# Altium PCB SolarMetering1.0.PcbDoc
Units mil, origin at the board's own origin, x right, y up, seen from the top; angles counter-clockwise.
Board outline 6000 x 4000 mil, 2 copper layers (Top Layer, Bottom Layer); 112 components, 77 nets, 362 pads, 0 vias.
Unrouted connection lines stored in the file: 249.
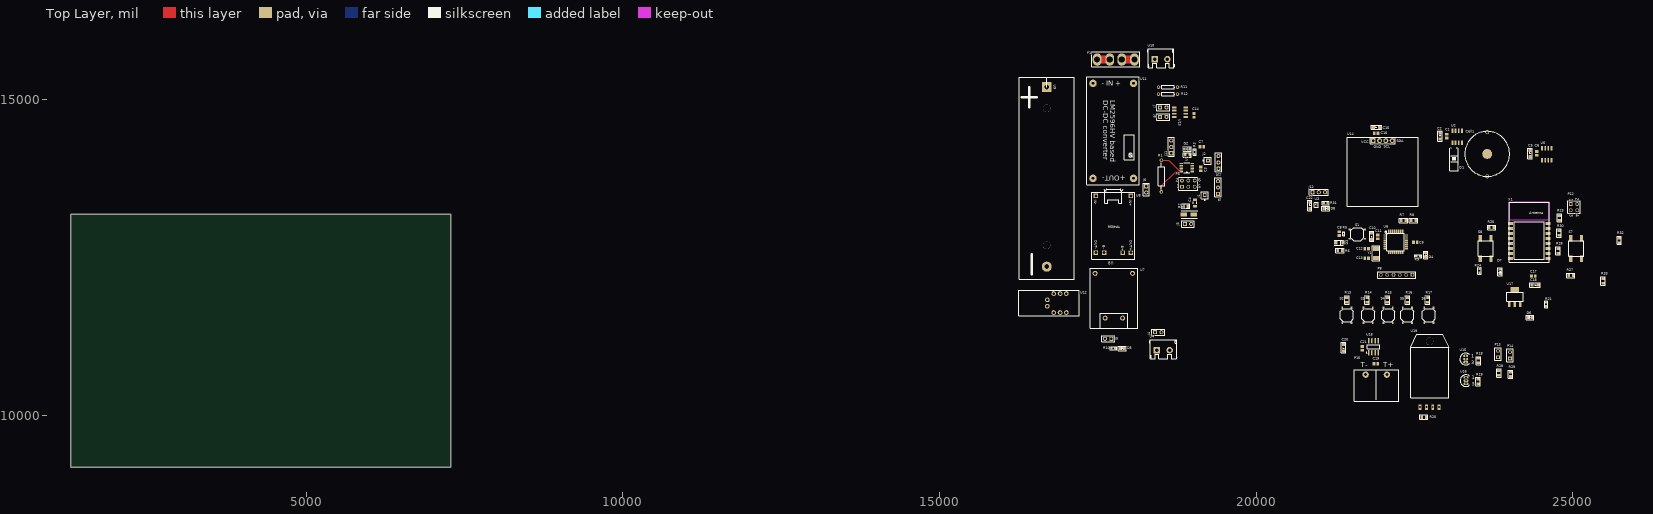
[diagram p0: Top Layer view]
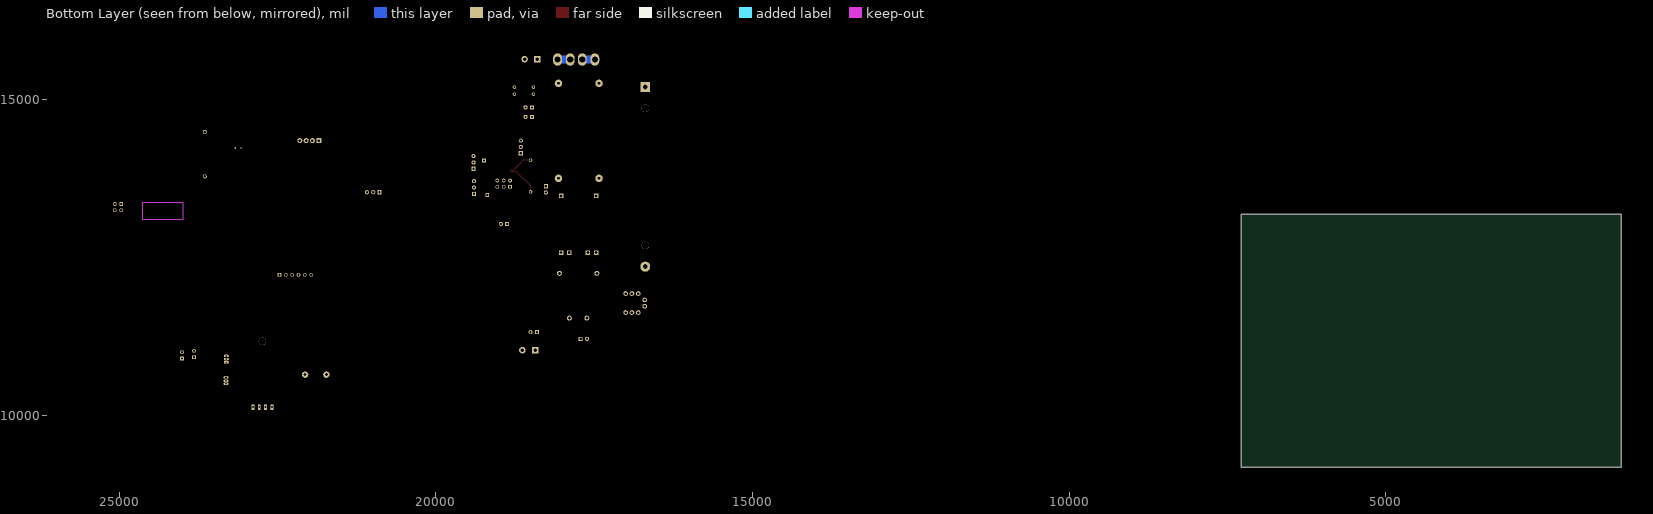
[diagram p1: Bottom Layer view, seen from below]

## Layer stack, top to bottom
Top Solder: solder mask 0.4, Solder Resist, Dk 3.5
Top Layer: signal copper 1.4
Dielectric 1: dielectric 12.6, FR-4, Dk 4.8
Bottom Layer: signal copper 1.4
Bottom Solder: solder mask 0.4, Solder Resist, Dk 3.5

## Board outline
1280,9185 7280,9185 7280,13185 1280,13185

## Design rules (kind name [scope] priority, off if disabled: settings)
Clearance [All] p1: gap=10
PolygonConnect [All] p1: connectstyle=Relief reliefconductorwidth=10 reliefentries=4 polygonreliefangle="90 Angle" airgapwidth=10
RoutingLayers "Schematic Routing Layers_1" [InNet('XTAL2')] p1: top layer_v5=TRUE bottom layer_v5=FALSE
RoutingLayers "Schematic Routing Layers" [InNet('XTAL1')] p2: top layer_v5=TRUE bottom layer_v5=FALSE
RoutingLayers [All] p3: top layer_v5=TRUE bottom layer_v5=TRUE
RoutingVias [All] p1: holewidth=28 width=50 viastyle="Through Hole" minholewidth=28 minwidth=50 maxholewidth=28 maxwidth=50
SolderMaskExpansion [All] p1: expansion=4
Width "Schematic Width Constraint_3" [InNet('NetJ8_2')] p1: maxlimit=70 minlimit=70 preferedwidth=70 minimp=50.000000 maximp=50.000000 favimp=50.000000
Width "Schematic Width Constraint_2" [InNet('NetP7_1')] p2: maxlimit=70 minlimit=70 preferedwidth=70 minimp=50.000000 maximp=50.000000 favimp=50.000000
Width "Schematic Width Constraint_1" [InNet('NetP9_2')] p3: maxlimit=70 minlimit=70 preferedwidth=70 minimp=50.000000 maximp=50.000000 favimp=50.000000
Width "Schematic Width Constraint" [InNet('NetJ7_2')] p4: maxlimit=70 minlimit=70 preferedwidth=70 minimp=50.000000 maximp=50.000000 favimp=50.000000
Width [All] p5: maxlimit=100 minlimit=10 preferedwidth=10
29 further rules are at their usual default settings.

## Components (designator, comment, footprint, x,y, rotation, side; value= is the part's Value field where it differs from the comment)
C1 "302010165" C0805 23010,14414.53 r90 top
C2 "302020002" AVX-A 22905,14420 r270 top
C3 "302010165" C0805 19130,13900 r270 top
C4 "302010189" C1206 19035,13360 r270 top
C5 "302020002" AVX-A 24325,14140 r270 top
C6 "302010165" C0805 24430,14145 r90 top
C7 "302010165" C0805 19145,14245 r180 top
C8 "302010165" C0805 21310,12875 r270 top
C9 "302010165" C0805 22515,12740 r0 top
C10 "302020002" AVX-A 21825,12835 r90 top
C11 "302010165" C0805 21920,12825 r270 top
C12 "302010018" C0805 21745,12640 r0 top
C13 "302010018" C0805 21745,12490 r0 top
C14 "1nF Filter" C0805 19020,14745 r90 top
C15 "302020002" AVX-A 21900,14555 r0 top
C16 "302010165" C0805 21895,14465 r180 top
C17 "302010165" C0805 24379.53,12200 r0 top
C18 "302020002" AVX-A 24405,12065 r180 top
C19 "302010175" C0805 21890.47,10825 r0 top
C20 "302020002" AVX-A 21380,11075 r90 top
C21 "302010165" C0805 21675,11065.47 r270 top
C22 "302020002" AVX-A 20850,13320 r270 top
Cell1 "Cell-CR1616" CellCR1616 23650,13780.67 r90 top
D1 "SMAJ75A-13-F" SMAJ5.0-TVS 19017.48,13180 r180 top
D2 "304090046" LED-0805 18915,14215 r180 top
D3 "Diode" "1206 Diode SMD" 21375,12735 r180 top
D4 "304090046" LED-0805 22680,12538.9 r90 top
D5 "304090046" LED-0805 17885,11065 r0 top
D6 "304090046" LED-0805 24325,11550 r0 top
D7 "304090046" LED-0805 23855,12273.9 r90 top
D8 "304090046" LED-0805 21100,13275 r0 top
F1 "BK-6010" "FUSE BLOCK BLADE PCB" 17412.36,15513.11 r0 top
J1 "Socket" PIN1 19190,13485 r180 top
J2 "Socket" PIN1 19240,14030 r90 top
J3 "Jumper 2Pin" H2-2.54 18925,13030 r90 top
J4 "Jumper 2Pin" H2-2.54 18455,11320 r90 top
J5 "Jumper 2Pin" H2-2.54 17665,11215 r270 top
J6 "Test DC-DC Ouput" H2-2.54 18265,13575 r0 top
J7 "Isolate ACS" H2-2.54 18535,14870 r90 top
J8 "Isolate ACS" H2-2.54 18535,14720 r90 top
J9 "ADR1" H3-2.54 19400,13605 r180 top
J10 "ADR0" H3-2.54 19405,14000 r180 top
J11 "ADR0" H3-2.54 18660,14245 r180 top
J12 "Wakeup Test" H3-2.54 20990,13530 r90 top
P3 "Header 3X2" HDR2X3 18830,13615 r0 top
P8 "320020077" HDR1X6 22470,12225 r180 top
P12 "Header 2X2" HDR2X2 24970,13345 r270 top
P13 "Thermistor A" HDR1X2 23820,10925 r90 top
P14 "Thermistor B" HDR1X2 24010,10905 r90 top
P15 "Thermocouple" ScrewTerminal8.5 21730.35,10650 r0 top
Q1 "32.768KHz" RTC-XTAL 23075,14225 r0 top
R1 "Res Semi" AXIAL-0.5 18505,13785 r90 top
R2 "51Ohm" R0805 18890,13310 r90 top
R3 "301010297" R0603 19030,14165 r180 top
R4 "301010361" R0805 18915,14120 r90 top
R5 "301010006" R0402 21385,12875 r180 top
R6 "301010361" R0805 21325,12610 r90 top
R7 "4.7K" R0805 22330,13085 r90 top
R8 "4.7K" R0805 22485,13085 r90 top
R9 "301010297" R0603 22560,12520 r270 top
R10 "301010297" R0603 17745,11065 r270 top
R11 "Res1" AXIAL-0.3 18610,15190 r180 top
R12 "Res1" AXIAL-0.3 18610,15080 r0 top
R13 "301010361" R0805 21435,11830 r0 top
R14 "301010361" R0805 21753.75,11830 r0 top
R15 "301010361" R0805 22072.5,11830 r0 top
R16 "301010361" R0805 22391.25,11830 r0 top
R17 "301010361" R0805 22710,11830 r0 top
R18 "10K" R0805 23510,10870 r180 top
R19 "10K" R0805 23505,10540 r180 top
R20 "10K" R0805 22650,9980 r270 top
R21 "301010297" R0603 24580,11760 r0 top
R23 "301010311" R0805 24790,13125 r0 top
R24 "301010297" R0603 23528.15,12290 r180 top
R25 "301010361" R0805 23720,12975 r270 top
R26 "301010361" R0805 24770,12605 r0 top
R27 "301010361" R0805 24970,12215 r90 top
R28 "10K" R0805 23835,10675 r0 top
R29 "10K" R0805 24020,10655 r0 top
R30 "301010311" R0805 24785,12885 r180 top
R31 "301010297" R0603 21100,13360 r270 top
R32 "301010311" R0805 25735,12770 r0 top
R33 "301010361" R0805 25480,12130 r0 top
S1 "311020017" SW4-SMD-5.2X5.2X1.5MM 21600,12870 r180 top
S2 "311020017" SW4-SMD-5.2X5.2X1.5MM 21435,11590 r90 top
S3 "311020017" SW4-SMD-5.2X5.2X1.5MM 21770,11590 r90 top
S4 "311020017" SW4-SMD-5.2X5.2X1.5MM 22085,11590 r90 top
S5 "311020017" SW4-SMD-5.2X5.2X1.5MM 22390,11590 r90 top
S6 "311020017" SW4-SMD-5.2X5.2X1.5MM 22730,11590 r90 top
S7 "311020004" SW4-SMD-6.0X6.0X5.0MM 25055,12640 r90 top
S8 "311020004" SW4-SMD-6.0X6.0X5.0MM 23625,12640 r90 top
U1 "LTC2945" LTC2945 18961,13997 r180 top
U2 "DS1307Z+" SO08 23175,14405 r0 top
U3 "ADP119" BGA3x2 20940,13354.68 r0 top
U4 "Solar OUTPUT PG" "SCREW TERMINAL" 18335.76,10900.19 r0 top
U5 "24LC256" SO08 24590,14130 r0 top
U6 "ATmega328P-AU" TQFP32-0.8-7X7MM 22205,12745 r0 top
U7 "Boost 3.7V -5V" "Boost Cov" 17460,12250 r0 top
U8 "TP4056 BAT CHARGER" TP4056 17439.65,12491.61 r180 top
U9 "LI-ION" Cell-Holder 16695,15189.65 r270 top
U10 "Solar Input PG" "SCREW TERMINAL" 18300.76,15495.19 r0 top
U11 "LM2596HV" "LM2596HVS DC-DC STEP-DOWN MODULE" 18125,13650 r270 top
U12 "MAX17043" MAX17043 16709.41,11777.17 r90 top
U13 "ACS712 20A Current Sensor" SO08 18800,14795 r270 top
U14 "OLED-128x64-SSD1306" OLED-128x64 21424.57,13321.97 r0 top
U15 "DS18B20" TO-92 23310,10895 r0 top
U16 "DS18B20" TO-92 23315,10555 r0 top
U17 "AMS1117" AMS1117-3.3 23995,11760 r0 top
U18 "MAX6675" SO8_N 21855,11090 r90 top
U19 "DHT22" DHT22_AM2303_HORIZ 22740,10685 r0 top
X1 "ESP-12" ESP8266-12E 24009.37,12453.46 r0 top
Y1 "306010054" SMT_XTAL 21895,12635.67 r270 top

## Footprints (in the part's own frame and the unit in brackets; to place one, negate y for a bottom-side part, rotate by r counter-clockwise, add the part's x,y. Pads: shape width x height; smd on the part's side, far side on the other; paste and mask are expansions set on the pad)
"1206 Diode SMD" [mm] "CD1206-S01575CT-ND"
  rect 1.5x1.6 smd: 1(0,0) 2(3,0)
  silkscreen extent 0,-1 3.5,1
AMS1117-3.3 [mm]
  rect 3.5x2 smd: 0(2.29,5.9)
  rect 1x2 smd: 1(0,0) 2(2.29,0) 3(4.58,0)
  silkscreen extent -1,1.25 5.65,4.8
AVX-A [mil]
  rect 50x50 smd: +(-50,0) -(50,0)
  silkscreen extent -82,-33 82,33
AXIAL-0.3 [mm] "Axial Device, Thru-Hole; 2 Leads; 0.3 in Pin Spacing"
  round 1.4 hole 0.85: 1(-3.81,0) 2(3.81,0)
  silkscreen extent -2.77,-0.76 2.77,0.76
AXIAL-0.5 [mm] "Axial Device, Thru-Hole; 2 Leads; 0.5 in Pin Spacing"
  round 1.4 hole 0.85: 1(-6.35,0) 2(6.35,0)
  silkscreen extent -5.33,-1.27 5.33,1.27
BGA3x2 [mm]
  round 0.295 smd: A1(0,0) A2(0.5,0) B1(0,-0.5) B2(0.5,-0.5) C1(0,-1) C2(0.5,-1)
  silkscreen extent -0.5,-1.5 1,0.5
"Boost Cov" [mm] "3.7 to 5V"
  round 2 hole 1.2: IN+(0,0) IN-(15,0) OUT+(4,-18) OUT-(11,-18)
  silkscreen extent -2,-22 17,2
C0805 [mm] "Chip Capacitor, Body 2.0x1.3mm, IPC High Density"
  rect 1.1x1.4 smd: 1(-0.75,0) 2(0.75,0)
  body extent -1.1,-0.72 1.1,0.72, height 1.4
C1206 [mm] "Chip Capacitor, Body 3.2x1.6mm, IPC High Density"
  rect 1.1x1.7 smd: 1(-1.35,0) 2(1.35,0)
  silkscreen extent -0.4,-0.75 0.4,0.75, body extent -1.7,-0.9 1.7,0.9, height 1.3
Cell-Holder [mm] "18056"
  rect 4x4 hole 2: 1(0,0)
  round 4 hole 2: 2(72,0)
  round 3 hole 3: " "(8.5,0) " "(63.5,0)
  silkscreen extent -4,-11 77,11
CellCR1616 [mm]
  round 1.6 hole 1: 1+(0,0) 2+(17.78,0)
  round 4 smd: 3-(9,0)
  silkscreen extent 0,-9 18,9
DHT22_AM2303_HORIZ [mil]
  rect 47.2x85 hole 31.4: DATA(-50,-550) GND(150,-550) NC(50,-550) VDD(-150,-550)
  round 118.11 hole 118.11 unplated: ""(0,490)
  silkscreen extent -300,-400 300,600
ESP8266-12E [mm]
  rect 2x1.2 smd: 1(0.27,14.801) 2(0.27,12.801) 3(0.27,10.801) 4(0.27,8.801) 5(0.27,6.801) 6(0.27,4.801) 7(0.27,2.801) 8(0.27,0.801) 9(15.27,0.801) 10(15.27,2.801) 11(15.27,4.801) 12(15.27,6.801) 13(15.27,8.801) 14(15.27,10.801) 15(15.27,12.801) 16(15.27,14.801)
  Top Layer keep-out region: -0.23,16.301 15.77,16.301 15.77,23.301 -0.23,23.301
  Bottom Layer keep-out region: -0.23,16.301 15.77,16.301 15.77,23.301 -0.23,23.301
  silkscreen extent -0.23,-0.7 15.77,23.3
"FUSE BLOCK BLADE PCB" [mm] "BK-6010"
  oval 3.5x5 hole 2.5: 1(1.972,2.842) 2(16.958,2.842) ""(7.052,2.842) ""(11.878,2.842)
  Top Layer region: 12.894,4.366 15.444,4.366 15.444,1.308 12.894,1.308
  Top Layer region: 3.345,4.372 5.655,4.366 5.655,1.318 3.369,1.318
  Bottom Layer region: 13.035,4.372 15.585,4.372 15.585,1.312 13.035,1.312
  Bottom Layer region: 3.345,4.372 5.655,4.366 5.655,1.318 3.369,1.318
  silkscreen extent -0.23,0 19.16,6
H2-2.54 [mil]
  rect 65x65 hole 35: 1(0,50)
  round 65 hole 35: 2(0,-50)
  silkscreen extent -50,-100 50,100
H3-2.54 [mil]
  rect 65x65 hole 35: 1(0,100)
  round 65 hole 35: 2(0,0) 3(0,-100)
  silkscreen extent -50,-150 50,150
HDR1X2 [mm] "Connector; Header; 2 Position"
  rect 1.5x1.5 hole 0.9: 1(0,0)
  round 1.5 hole 0.9: 2(2.54,0)
  silkscreen extent -1.27,-1.27 3.81,1.27
HDR1X6 [mm] "Connector; Header; 6 Position"
  rect 1.5x1.5 hole 0.9: 1(0,0)
  round 1.5 hole 0.9: 2(2.54,0) 3(5.08,0) 4(7.62,0) 5(10.16,0) 6(12.7,0)
  silkscreen extent -1.27,-1.27 13.97,1.27
HDR2X2 [mm] "Connector; Header; 2x2 Position"
  rect 1.5x1.5 hole 0.9: 1(0,0)
  round 1.5 hole 0.9: 2(0,2.54) 3(2.54,0) 4(2.54,2.54)
  silkscreen extent -1.27,-1.27 3.81,3.81
HDR2X3 [mm] "Connector; Header; 3x2 Position"
  rect 1.5x1.5 hole 0.9: 1(0,0)
  round 1.5 hole 0.9: 2(0,2.54) 3(2.54,0) 4(2.54,2.54) 5(5.08,0) 6(5.08,2.54)
  silkscreen extent -1.27,-1.27 6.35,3.81
LED-0805 [mil]
  rrect25% 35x50 smd: +(-35,0) -(35,0)
  silkscreen extent -63,-35 63,35
"LM2596HVS DC-DC STEP-DOWN MODULE" [mm]
  round 3 hole 0.914 slot 0.96 at 0 deg: 1(-40.64,-1.524) 2(-40.64,-17.78) 3(-2.54,-17.78) 4(-2.54,-1.524)
  silkscreen extent -43.18,-20.24 0,0.76
LTC2945 [mil] "12MSOP"
  rect 55x17 smd: 1(-31,144) 2(-31,118) 3(-31,93) 4(-31,67) 5(-31,42) 6(-31,16) 7(141,16) 8(141,42) 9(141,67) 10(141,93) 11(141,118) 12(141,144)
  silkscreen extent 7,0 103,160
MAX17043 [mil] "Fuel Guage"
  round 74 hole 40: 1(-47.17,4.41) 2(-147.17,-95.59) 3(-147.17,-195.59) 4(-147.17,-295.59) 5(152.83,-295.59) 6(152.83,-195.59) 7(152.83,-95.59) 8(52.83,4.41)
  silkscreen extent -197,-496 203,454
OLED-128x64 [mm] "SSD1306 OLED 128x64 I2C"
  rect 2x2 hole 1: 1(10.806,25.985)
  round 2 hole 1: 2(13.346,25.985) 3(15.886,25.985) 4(18.426,25.985)
  silkscreen extent 0.39,-0.43 28.84,27.26
PIN1 [mm] "Connector; Plug"
  rect 1.5x1.5 hole 0.9: 1(0,0)
  silkscreen extent -1.4,-1.4 1.4,2.17
R0402 [mil]
  rrect50% 19.69x19.69 smd: 1(0,18.21) 2(0,-18.21)
  silkscreen extent -16,-33 16,33
R0603 [mil]
  rrect25% 35x35 smd: 1(0,30) 2(0,-30)
  silkscreen extent -25,-55 25,55
R0805 [mil]
  rrect25% 55x40 smd: 1(0,35) 2(0,-35)
  silkscreen extent -35,-65 35,65
RTC-XTAL [mm] "RTC Crystal 32.768KHz"
  round 0.8 hole 0.5: 1(0,0) 2(2.54,0)
  silkscreen extent -0.5,-9 3,0
"SCREW TERMINAL" [mil] "PG Connector"
  rect 102.4x102.4 hole 55.2: 1(99.24,134.81)
  round 102.4 hole 55.2: 2(299.24,134.81)
  silkscreen extent -15,-3 414,304
ScrewTerminal8.5 [mm] "KF8500 Greeen Screw Terminal for Thermocouple"
  round 2.54 hole 1.2: 1(0,0) 2(8.5,0)
  silkscreen extent -4.57,-10.67 13.21,2.03
SMAJ5.0-TVS [mm] "400W SURFACE MOUNT TRANSIENT VOLTAGE SUPPRESSOR"
  rect 2.5x1.7 smd: 1(0,0) 2(4,0)
  silkscreen extent -1.5,-1.5 5,1.5
SMT_XTAL [mm]
  rect 1.7x2.4 smd: 1(0,0) 2(3.7,0)
  silkscreen extent -1.15,-1.45 4.75,1.45
SO08 [mm]
  rect 0.72x1.78 smd: 1(-1.905,-2.35) 2(-0.635,-2.35) 3(0.635,-2.35) 4(1.905,-2.35) 5(1.905,2.35) 6(0.635,2.35) 7(-0.635,2.35) 8(-1.905,2.35)
SO8_N [mm] "SOIC, 8-Leads, Body 4.9x3.9mm, Pitch 1.27mm, IPC Medium Density"
  oval 2.2x0.6 smd: 1(-2.4,1.905) 2(-2.4,0.635) 3(-2.4,-0.635) 4(-2.4,-1.905) 5(2.4,-1.905) 6(2.4,-0.635) 7(2.4,0.635) 8(2.4,1.905)
  silkscreen extent -2.52,-2.5 0.9,2.88, body extent -2,-2.5 2,2.5, height 1.75
SW4-SMD-5.2X5.2X1.5MM [mm]
  rect 1x0.7 smd: 1(-3,1.85) 2(3,1.85) 3(-3,-1.85) 4(3,-1.85)
  silkscreen extent -2.6,-2.6 2.6,2.6
SW4-SMD-6.0X6.0X5.0MM [mil]
  rect 100x50 smd: 1(-162.56,85) 2(-162.56,-85) 3(162.56,-85) 4(162.56,85)
  silkscreen extent -120,-120 120,120
TO-92 [mm] "TO, Flat Index; 3 In-Line, Axial Leads; Body Dia. 4.6mm; Leads 0.41 x 0.39 mm (max)"
  oval 2x1 hole 0.7: 1(0,1.27) 2(0,0) 3(0,-1.27)
  silkscreen extent -2.34,-2.34 1.35,2.34
TP4056 [mm] "BAT CHARGER"
  rect 1.8x1.8 hole 1.199: 1(-14.817,-24.922) 2(-0.817,-24.922) 3(-14.817,-2.118) 4(-0.817,-2.118) 5(-11.566,-2.118) 6(-4.068,-2.118)
  silkscreen extent -16.45,-27.63 0.82,0.55
TQFP32-0.8-7X7MM [mil]
  rect 50x22 smd: 1(-169,110.24) 2(-169,78.74) 3(-169,47.24) 4(-169,15.75) 5(-169,-15.75) 6(-169,-47.24) 7(-169,-78.74) 8(-169,-110.24) 17(169,-110.24) 18(169,-78.74) 19(169,-47.24) 20(169,-15.75) 21(169,15.75) 22(169,47.24) 23(169,78.74) 24(169,110.24)
  rect 22x50 smd: 9(-110.24,-169) 10(-78.74,-169) 11(-47.24,-169) 12(-15.75,-169) 13(15.75,-169) 14(47.24,-169) 15(78.74,-169) 16(110.24,-169) 25(110.24,169) 26(78.74,169) 27(47.24,169) 28(15.75,169) 29(-15.75,169) 30(-47.24,169) 31(-78.74,169) 32(-110.24,169)
  silkscreen extent -170,-138 138,170

## Part data
C1 C3 C6 C7 C8 C9 C11 C16 C17 C21: library part CERAMIC-100NF-50V-10%-X7R(0805), "100nF"
C2 C5 C10 C15 C18 C20 C22: library part TANTALUM-SMD-10UF-16V-10%(AVX-A), "10uF Cap Decoupling 16V"
C4: library part CERAMIC-1NF-1KV-10%-X7R?(1206)
C12 C13: library part CERAMIC-22PF-50V-5%-NPO(0402)
C14: library part CERAMIC-100NF-25V-10%-X7R(0402), "1nF Filter Cap as per Datasheet"
C19: library part CERAMIC-10NF-50V-5%-X7R(0805)
D1: library part "D Schottky", "SMA"
D2 D4 D5 D6 D7 D8: library part SMD-LED-CLEAR-RED(0805)
D3: "Default Diode"
F1: library part "Fuse 2", "BK-6010, BK-6010-ND,"
J3 J4 J5 J6 J7 J8: library part Jumper, "2.54, Pin header"
J9 J10 J11 J12: library part "Jumper Select", "2.54mm Pitch male header"
P3: "Header, 3-Pin, Dual row"
P8: library part DIP-BLACK-MALE-HEADER(2X3P-2.54)-2.54
P12: "Header, 2-Pin, Dual row"
P13 P14: library part "Header 2", "Header, 2-Pin"
P15: library part ScrewTerminal8.5, "K Type Termocouple"
Q1: library part CRYTALTC38H
R1: "Semiconductor Resistor"
R2 R7 R8 R18 R19 R20 R28 R29: library part RESISTOR0805_NOOUTLINE, "Resistors   For new designs, use the packages preceded by an '_' character since they are more reliable:   The following footprints should be used on most boards: _0402 - Standard footprint for regular board layouts  _0603 - Standard footprint for regular board layouts  _0805 - Standard footprint for regular board layouts  _1206 - Standard footprint for regular board layouts       For extremely tight-pitch boards where space is at a premium, the following 'micro-pitch' footprints can be used (smaller pads, no silkscreen outline, etc.): _0402MP - Micro-pitch footprint for very dense/compact boards  _0603MP - Micro-pitch footprint for very dense/compact boards  _0805MP - Micro-pitch footprint for very dense/compact boards  _1206MP - Micro-pitch footprint for very dense/compact boards"
R3 R9 R10 R21 R24 R31: library part SMD-RES-390R-5%-1/10W(0603)
R4: library part SMD-RES-10K-1%-1/8W(0805), "10K"
R5: library part SMD-RES-1K-5%-1/16W(0402)
R6: library part SMD-RES-10K-1%-1/8W(0805), "Pull up 10K resistor"
R11 R12: "Resistor"
R13 R14 R15 R16 R17 R25 R26 R27 R33: library part SMD-RES-10K-1%-1/8W(0805), "Pull up 10K resistor for button"
R23 R30 R32: library part SMD-RES-1K-5%-1/8W(0805)
S1 S2 S3 S4 S5 S6: library part SMD-BUTTON(4P-5.2X5.2X1.5MM-SKQGADE010)-SKQGADE010
S7 S8: library part SMD-SWITCH-TACTILE-SPST-NO(4P-D6.0MM)
U1: "V I P Monitor I2C Interface"
U2: "RTC circuit%3B I2C%3B NV SRAM%3B 56B%3B 4.5%C3%B75.5VDC%3B SO8"
U4 U10: library part PG_IN
U6: "8-bit AVR Microcontroller, 32KB Flash, 1KB EEPROM, 2KB SRAM, 32-pin TQFP, Industrial Grade (-40°C to 85°C)"
U7: library part Boost-3.7V-5V, "Boost converter module from Cell to 5V"
U8: library part TP4056, "TP4056 Module"
U9: library part Battery, "Li Ion Battery 3.7V"
U11: "DC DC Adjustable Buck converter input upto 60V"
U12: "Battery Fuel Guage"
U13: library part ACS712
U14: "OLED Display OLED-128x64-SSD1306"
U15 U16: "On Board Temperature Sensor"
U17: "3.3V Regulator"
U18: "K-Thermocoupleto-Digital  Converter"
U19: "Temperature and Humidity Sensor"
Y1: library part SMD-CRYSTAL-16MHZ-8PF-20PPM-40R(2P-5.0X3.2MM)

## Nets (pads, with @x,y where several pads share a name; then routed paths per layer and width w, separated by ;. In a path a pad name is that pad's centre, name@x,y a point inside that pad or via, vN(x,y) a via of type N, cw(c..) or ccw(c..) an arc to the next point about the centre after c; other vN are vias at no path point)
ACS-OUT: U6.19 U13.7
ADIN: J2.1 U1.5
ALERT-LTC2945: D2.- R4.1 U1.10 U6.32
BAT-ALT: U6.1 U12.4
BAT-OUT+: U7.IN+ U8.3
BAT-OUT-: U7.IN- U8.4
BATT+: U12.2
BATT-CHG+: U8.5 U9.1 U12.8
BATT-CHG-: U8.6 U9.2 U12.1
CH-PD: R25.1 X1.3
CS-K: U6.25
DC-DC-IN: J4.1 J8.1 U4.1 U11.1
DHT-DATA: R20.1 U6.10 U19.DATA
DOWN: R15.1 S4.2 U6.23
DS1820-DATA-1: R18.2 U6.2 U15.2
DS1820-DATA-2: R19.2 U6.9 U16.2
ESP-RXD: P12.4 U6.31
ESP-RXD-PIN: R23.1 R30.2 X1.15
ESP-TXD: P12.2 U6.30
GND: C1.1 C2.- C3.1 C4.1 C5.- C6.1 C7.1 C8.2 C9.1 C10.- C11.1 C12.1 C13.1 C14.1 C15.- C16.1 C17.1 C18.- C20.- C21.1 C22.- Cell1.3- D1.1 D4.- D5.- D6.- D8.- J9.1 J10.1 P8.4 P13.1 P14.1 R5.1 R12.1 R27.1 R32.1 S1.1 S1.2 S2.3 S3.3 S4.3 S5.3 S6.3 S7.2 S8.2 U1.6 U2.4 U3.C2 U4.2 U5.1 U5.2 U5.3 U5.4 U6.3 U6.5 U6.21 U7.OUT- U10.2 U11.2 U12.3 U13.5 U14.2 U15.1 U16.1 U17.1 U18.1 U19.GND X1.9
GPIO0: D7.- S7.4 X1.12
GPIO2: R26.1 X1.11
GPIO15: R27.2 X1.10
LEFT: R16.1 S5.2 U6.13
MISO: P8.1
MOSI: P8.5
NetC3_2: C3.2 P3.2 P3.4 P3.6 U1.1
NetC4_2: C4.2 P3.1 R2.2
NetC9_2: C9.2 U6.20
NetC14_2: C14.2 U13.6
NetC19_1: C19.1 P15.1 U18.2
NetC19_2: C19.2 P15.2 U18.3
NetCell1_1+: Cell1.1+ Cell1.2+ U2.3
NetD1_2: D1.2 J3.1 R1.1 R2.1 U1.12 | length 502.4
  Top Layer w10: R1.1 18505,13630 18728,13853 U1.12
NetD2_+: D2.+ R3.2
NetD4_+: D4.+ R9.2
NetD5_+: D5.+ R10.1
NetD6_+: D6.+ R21.1
NetD7_+: D7.+ R24.1
NetD8_+: D8.+ R31.1
NetF1_2: F1.2 U10.1
NetJ1_1: J1.1 P3.5
NetJ4_2: J4.2 R1.2 U1.11 | length 379.6
  Top Layer w10: R1.2 18623,14035 18777.5,13880.5 18818.5,13880.5 U1.11
NetJ5_1: J5.1 R10.2
NetJ6_1: J6.1 U11.4
NetJ7_2: J7.2 U13.1 U13.2
NetJ8_2: J8.2 U13.3 U13.4
NetJ9_2: J9.2 U1.3
NetJ10_2: J10.2 U1.4
NetJ11_1: J11.1 U1.9
NetP12_1: P12.1 X1.16
NetP12_3: P12.3 R23.2
NetQ1_1: Q1.1 U2.1
NetQ1_2: Q1.2 U2.2
NetR30_1: R30.1 R32.2
PWR5+: J6.2 U8.1
PWR5-: U8.2 U11.3
RESET: C8.1 D3.1 P8.3 R5.2 R6.2 S1.3 S1.4 U6.29
RESET_ESP: R33.1 S8.4 X1.1
RIGHT: R13.1 S2.2 U6.16
S-IN: F1.1 J3.2 J7.1 R11.2
SCK: P8.2 R9.1 U6.17
SCK-K: U6.14 U18.5
SCL: R8.1 U1.7 U2.6 U5.6 U6.28 U12.6 U14.3
SDA: J11.2 R7.1 U1.8 U2.5 U5.5 U6.27 U12.7 U14.4
SELECT: R17.1 S6.2 U6.11
SO-K: U6.12 U18.6
THERMISTOR-A: P13.2 R28.2
THERMISTOR-B: P14.2 R29.2 U6.24
UP: R14.1 S3.2 U6.15
VCC-3V3: C17.2 C18.+ R21.2 R24.2 R25.2 R26.2 R33.2 U17.2 X1.8
VCC-5V: C7.2 C10.+ C11.2 C15.+ C16.2 C22.+ J5.2 J9.3 J10.3 J12.1 P3.3 P8.6 R3.1 R4.2 R7.2 R8.2 U1.2 U3.A1 U3.B1 U6.4 U6.6 U6.18 U7.OUT+ U13.8
VCC-5V-EN: C1.2 C2.+ C5.+ C6.2 C20.+ C21.2 D3.2 J12.3 R6.1 R13.2 R14.2 R15.2 R16.2 R17.2 R18.1 R19.1 R20.2 R28.1 R29.1 R31.2 U2.8 U3.A2 U3.B2 U5.8 U14.1 U15.3 U16.3 U17.3 U18.4 U19.VDD
VDVR-IN: R11.1 R12.2 U6.22
WAKE-UP: J12.2 U3.C1 U6.26
XTAL1: C12.2 U6.7 Y1.1
XTAL2: C13.2 U6.8 Y1.2
pads on no net: "U9. " F1. J11.3 S2.1 S2.4 S3.1 S3.4 S4.1 S4.4 S5.1 S5.4 S6.1 S6.4 S7.1 S7.3 S8.1 S8.3 U2.7 U5.7 U12.5 U17.0 U18.7 U18.8 U19. U19.NC X1.2 X1.4 X1.5 X1.6 X1.7 X1.13 X1.14

## Text inside footprints (layer, text, board x,y; h text height)
P3: Top Overlay "1" at 18750,13595 h50; Top Overlay "2" at 18730,13695 h50; Top Overlay "5" at 19090,13595 h50; Top Overlay "6" at 19090,13695 h50
P12: Top Overlay "3" at 24950,13185 h50 r270; Top Overlay "4" at 25050,13185 h50 r270; Top Overlay "2" at 25050,13445 h50 r270; Top Overlay "1" at 24950,13425 h50 r270
P15: Top Overlay "T+" at 22005.94,10768.11 h78.74; Top Overlay "T-" at 21651.61,10768.11 h78.74
U8: Top Overlay "OUT+" at 18006.22,12770.1 h39.37 r270; Top Overlay "B+" at 17871.72,12688.7 h39.37 r270; Top Overlay "B-" at 17577.92,12689 h39.37 r270; Top Overlay "OUT-" at 17456.22,12770.1 h39.37 r270; Top Overlay "IN+" at 17997.72,13410.3 h39.37 r270; Top Overlay "IN-" at 17447.72,13410.3 h39.37 r270; Top Overlay "TP4056" at 17857.4,12999.99 h39.37 r180
U11: Top Overlay "LM2596HV based" at 17695,14980 h80 r270; Top Overlay "DC-DC converter" at 17585,14980 h80 r270; Top Overlay "- IN +" at 17565,15210 h80; Top Overlay "+OUT-" at 17945,13790 h80 r180
U14: Top Overlay "GND" at 21857.64,14227.48 h39.37; Top Overlay "VCC" at 21660.79,14306.22 h39.37; Top Overlay "SDA" at 22220,14315.32 h39.37; Top Overlay "SCL" at 22020,14235.32 h39.37
U15: Top Overlay "1" at 23397.56,10917.05 h59.05; Top Overlay "3" at 23397.56,10814.88 h59.05
U16: Top Overlay "1" at 23402.56,10577.05 h59.05; Top Overlay "3" at 23402.56,10474.88 h59.05
X1: Top Overlay "Antenna" at 24311.34,13185.78 h42.5